# Altium PCB WT2.PcbDoc
Units mm, origin at the board's own origin, x right, y up, seen from the top; angles counter-clockwise.
Board outline 191.64 x 160.53 mm, 2 copper layers (Top Layer, Bottom Layer); 48 components, 68 nets, 157 pads, 0 vias.
Unrouted connection lines stored in the file: 67.
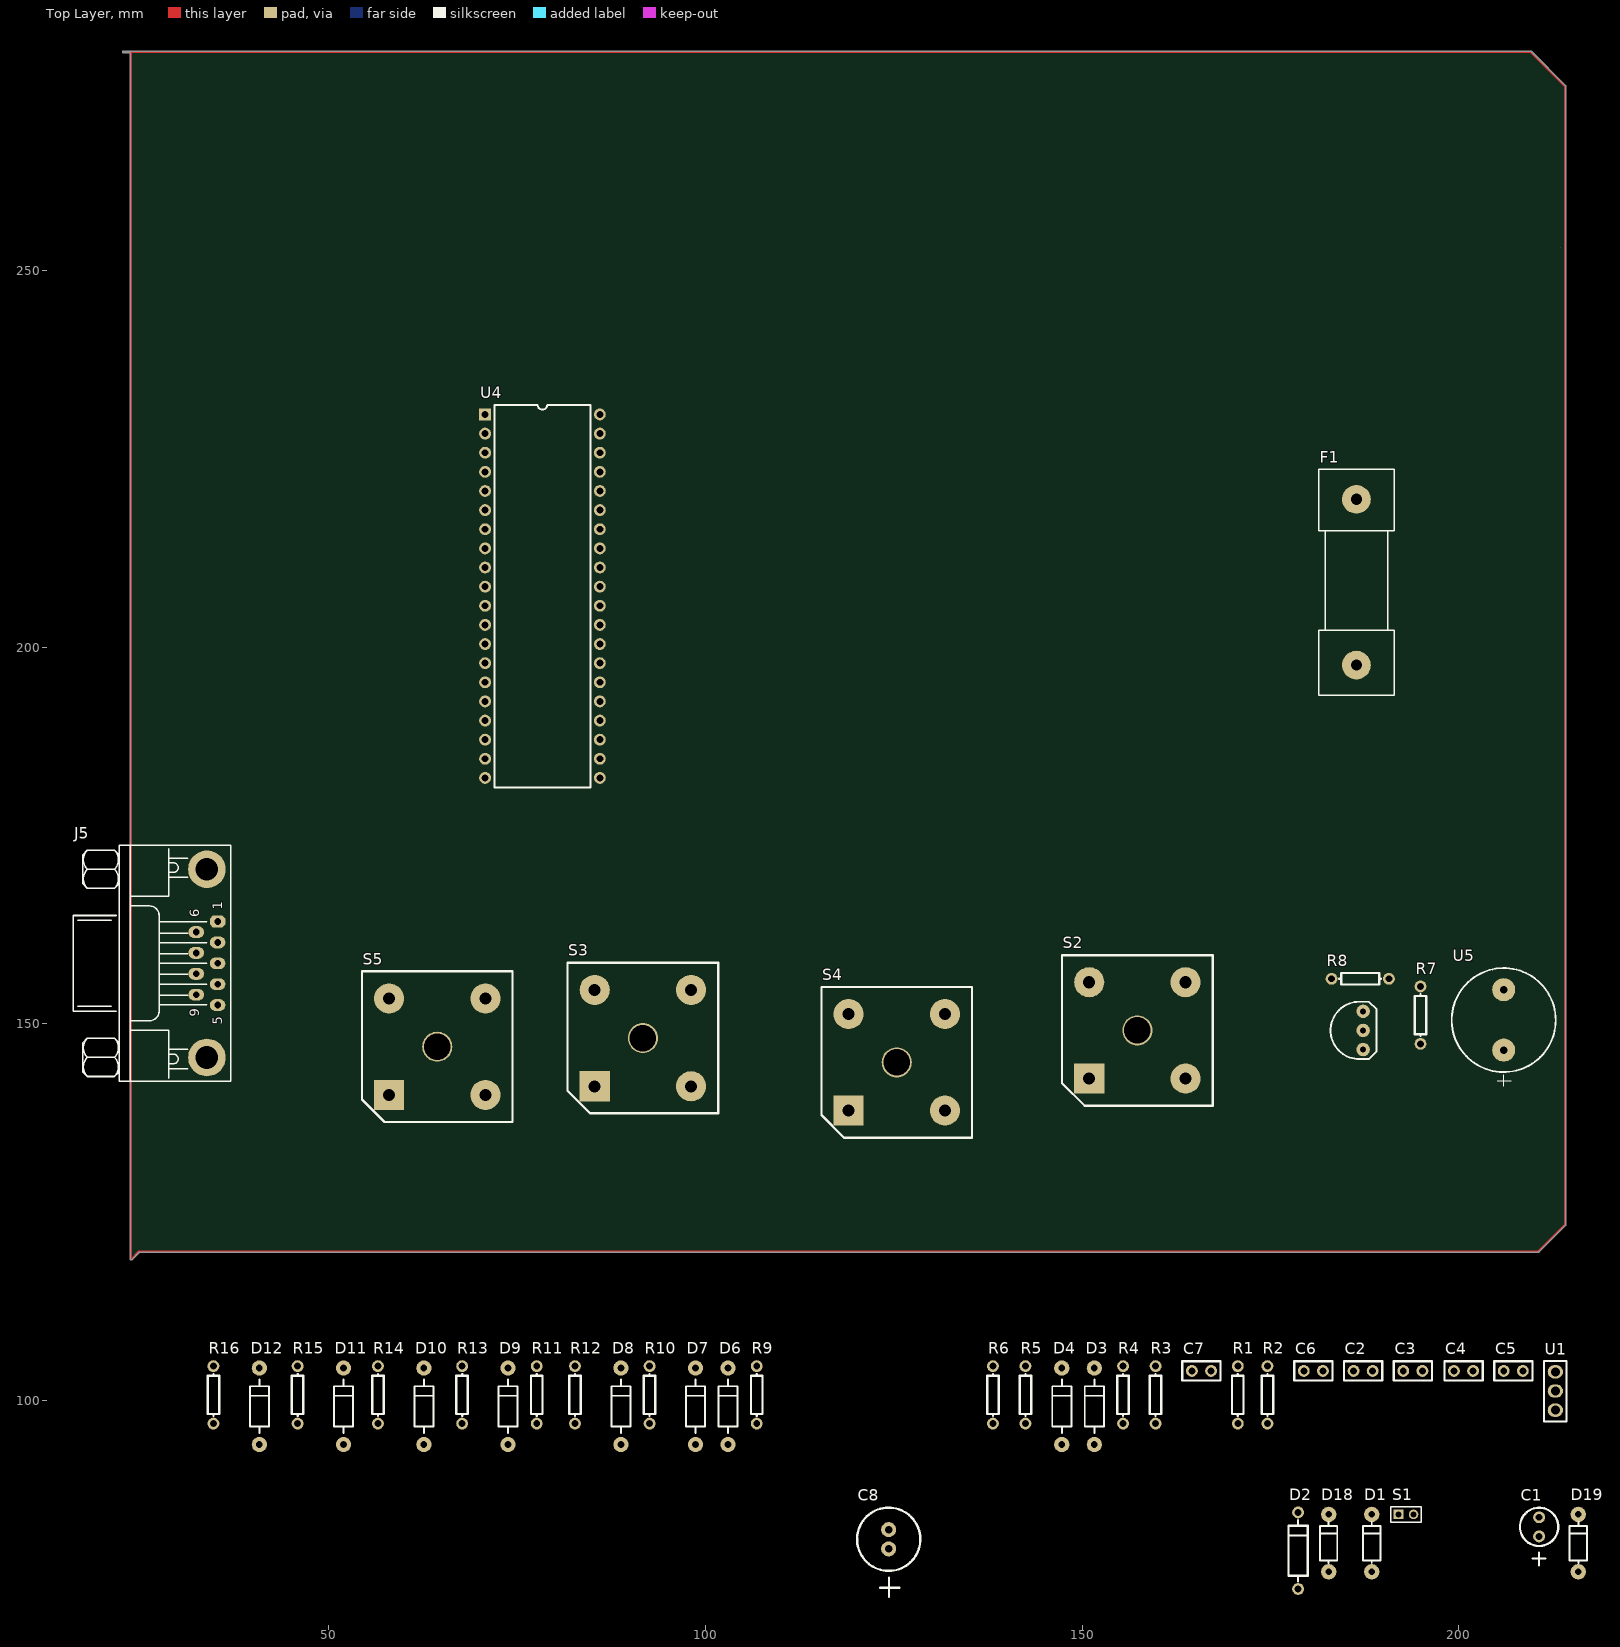
[diagram p0: Top Layer view]
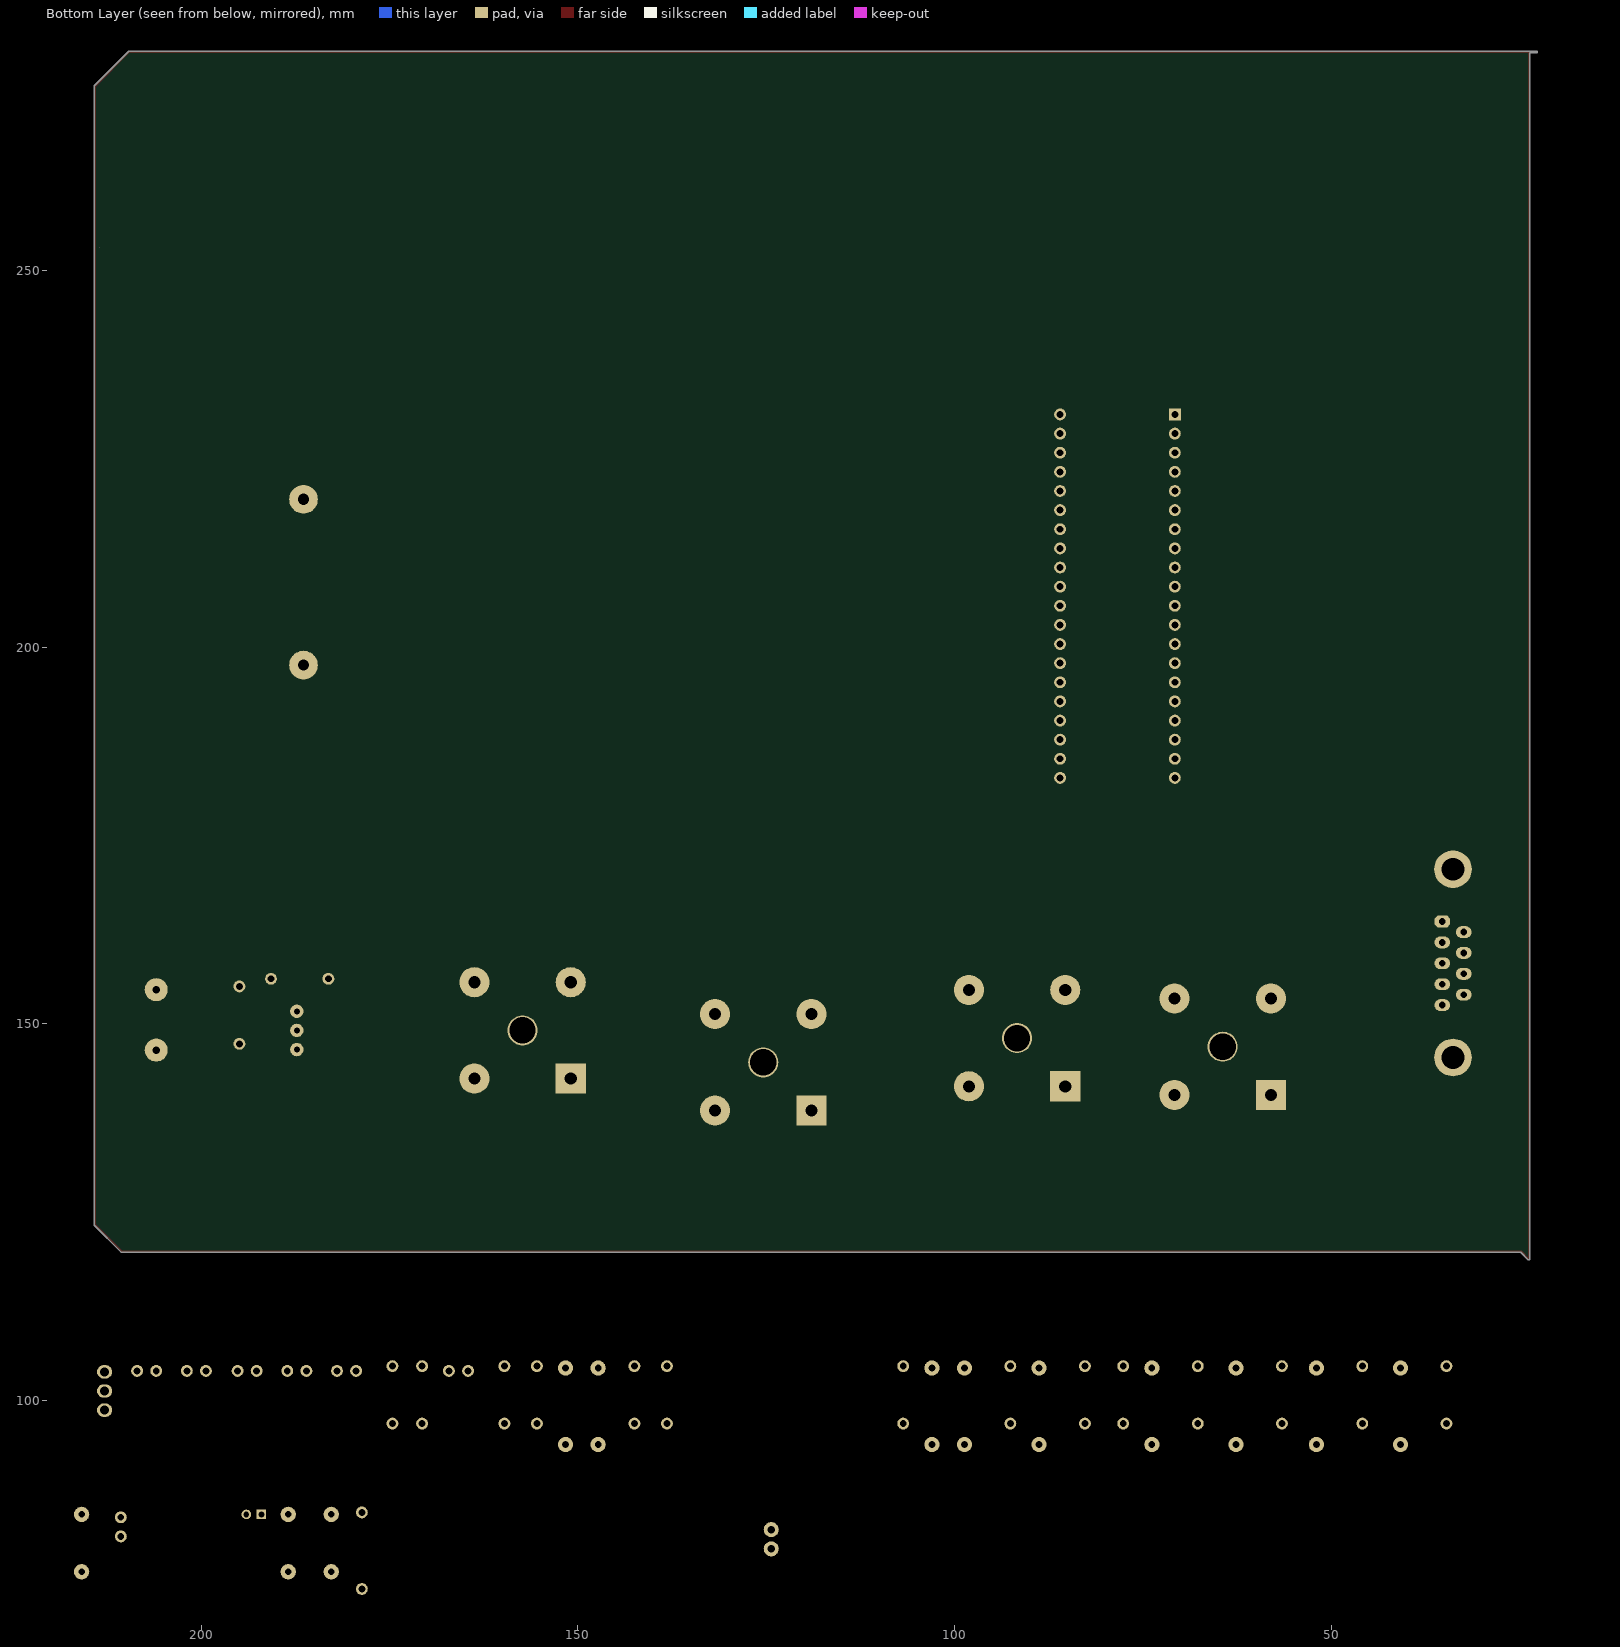
[diagram p1: Bottom Layer view, seen from below]

## Layer stack, top to bottom
Top Solder: solder mask 0.0102, Solder Resist, Dk 3.5
Top Layer: signal copper 0.0356
Dielectric1: dielectric 0.32, FR-4, Dk 4.8
Bottom Layer: signal copper 0.0356
Bottom Solder: solder mask 0.0102, Solder Resist, Dk 3.5

## Board outline
23.622,118.745 23.622,278.892 22.733,278.892 cw(c22.733,279.019) 22.733,279.146 209.55,279.146 cw(c209.55,279.019) 209.641,279.109 209.64,279.109 214.212,274.537 214.212,274.538 cw(c214.122,274.447) 214.249,274.447 214.249,123.317 cw(c214.122,123.317) 214.212,123.226 214.212,123.227 210.656,119.671 210.657,119.671 cw(c210.566,119.761) 210.566,119.634 24.818,119.634 23.839,118.655 23.84,118.655 cw(c23.749,118.745)
cut-out: 213.487,253.111
cut-out: 206.375,348.488

## Design rules (kind name [scope] priority, off if disabled: settings)
AssemblyTestPointUsage [All] p1 off:
AssemblyTestpoint [All] p1 off: testpointundercomponent=TRUE minsize=1.016 maxsize=2.54 preferedsize=1.524 minholesize=0 maxholesize=1.016 preferedholesize=0.813 testpointgrid=0.025 usegrid=TRUE gridtolerance=0 allowsidetop=TRUE allowsidebottom=TRUE
Clearance [All] p1: gap=0.254 ignorepadtopadclearanceinfootprint=FALSE except(0: Arc-Hole Track-Hole SMDPad-Hole THPad-Hole Via-Hole Fill-Hole Poly-Hole Region-Hole Text-Hole)
ComponentClearance [All] p1 off: gap=0.254 collisioncheckmode=3 verticalgap=0.254 showdistances=FALSE
DiffPairsRouting [All] p1 off: maxlimit=0.254 minlimit=0.254 mostfreqgap=0.254 toplayer_minwidth=0.381 toplayer_maxwidth=0.381 toplayer_prefwidth=0.381 bottomlayer_minwidth=0.381 bottomlayer_maxwidth=0.381 bottomlayer_prefwidth=0.381 maxuncoupledlength=12.7
FabricationTestPointUsage [All] p1 off: valid=0 allowmultiple=FALSE
FabricationTestpoint [All] p1 off: side=3 testpointundercomponent=TRUE minsize=1.016 maxsize=2.54 preferedsize=1.524 minholesize=0 maxholesize=1.016 preferedholesize=0.813 testpointgrid=0.025 allowsidetop=TRUE allowsidebottom=TRUE usegrid=TRUE gridtolerance=0
FanoutControl Fanout_BGA [IsBGA] p1 off: bgadir=Out bgaviamode=Centered fanoutstyle=Auto fanoutdirection=Alternating viagrid=0.025 // Fanout_BGA (Default Rule)
FanoutControl Fanout_LCC [IsLCC] p2 off: bgadir=Out bgaviamode=Centered fanoutstyle=Auto fanoutdirection=Alternating viagrid=0.025 // Fanout_LCC (Default Rule)
FanoutControl Fanout_SOIC [IsSOIC] p3 off: bgadir=Out bgaviamode=Centered fanoutstyle=Auto fanoutdirection=Alternating viagrid=0.025 // Fanout_SOIC (Default Rule)
FanoutControl Fanout_Small [(CompPinCount < 5)] p4 off: bgadir=Out bgaviamode=Centered fanoutstyle=Auto fanoutdirection=OutThenIn viagrid=0.025 // Fanout_Small (Default Rule)
FanoutControl Fanout_Default [All] p5 off: bgadir=Out bgaviamode=Centered fanoutstyle=Auto fanoutdirection=Alternating viagrid=0.025 // Fanout_Default (Default Rule)
Height [All] p1 off: minheight=0 maxheight=25.4 prefheight=12.7
HoleSize [All] p1 off: absolutevalues=TRUE maxlimit=2.54 minlimit=0.025 maxpercent=80.000 minpercent=20.000
HoleToHoleClearance [All] p1 off: gap=0.254 allowstackedmicrovias=TRUE
LayerPairs [All] p1 off: enforce=TRUE
MinimumSolderMaskSliver [All] p1 off: minsoldermaskwidth=0.254
NetAntennae [All] p1 off: netantennaetolerance=0
PasteMaskExpansion [All] p1 off: expansion=0
PlaneClearance [All] p1 off: clearance=0.508
PlaneConnect [All] p1 off: planeconnectstyle=Relief reliefexpansion=0.508 reliefentries=4 reliefconductorwidth=0.254 reliefairgap=0.254
PolygonConnect [All] p1 off: connectstyle=Relief reliefconductorwidth=0.254 reliefentries=4 polygonreliefangle="90 Angle" airgapwidth=0.254
RoutingCorners [All] p1 off: cornerstyle=45-Degree minsetback=2.54 maxsetback=2.54
RoutingLayers [All] p1 off: top layer_v5=TRUE bottom layer_v5=TRUE
RoutingPriority [All] p1 off: routingpriority=0
RoutingTopology [All] p1 off: topology=Shortest
RoutingVias [All] p1 off: holewidth=0.711 width=1.27 viastyle="Through Hole" minholewidth=0.711 minwidth=1.27 maxholewidth=0.711 maxwidth=1.27
SilkToSilkClearance [All] p1 off: silktosilkclearance=0.254
SilkToSolderMaskClearance SilkscreenOverComponentPads [IsPad] p1 off: minsilkscreentomaskgap=0.254 clearancetoexposedcopper=TRUE
SolderMaskExpansion [All] p1 off: expansion=0.102
Width [All] p1 off: maxlimit=0.254 minlimit=0.254 preferedwidth=0.254
4 further rules are at their usual default settings.

## Classes and differential pairs
component class WT2: C1 C2 C3 C4 C5 C6 C7 C8 D1 D2 D3 D4 D6 D7 D8 D9 D10 D11 D12 D18 D19 F1 J5 R1 R2 R3 R4 R5 R6 R7 R8 R9 R10 R11 R12 R13 R14 R15 R16 S1 S2 S3 S4 S5

## Components (designator, comment, footprint, x,y, rotation, side; value= is the part's Value field where it differs from the comment)
C1 "100uf" 10UF 210.693,81.915 r90 top
C2 "0.01u" RAD0.1 186.055,103.886 r0 top
C3 "0.01u" RAD0.1 192.659,103.886 r0 top
C4 "0.01u" RAD0.1 199.39,103.886 r0 top
C5 "0.01u" RAD0.1 205.994,103.886 r0 top
C6 "0.1u" RAD0.1 179.451,103.886 r0 top
C7 "1u" RAD0.1 164.592,103.886 r0 top
C8 "10uf" 100UF 124.333,80.264 r90 top
D1 "5V" Diode0.3 188.468,81.026 r90 top
D2 "5V" DIODE 178.689,74.93 r90 top
D3 "N1显示" DIODE0.4A 152.146,99.187 r90 top
D4 "N20显示" DIODE0.4A 147.828,99.187 r90 top
D6 "工作电压指示" DIODE0.4A 103.505,99.187 r90 top
D7 "20毫秒指示" DIODE0.4A 99.187,99.187 r90 top
D8 "40毫秒指示" DIODE0.4A 89.281,99.187 r90 top
D9 "80毫秒指示" DIODE0.4A 74.295,99.187 r90 top
D10 "单次/循环" DIODE0.4A 63.119,99.187 r90 top
D11 "启动检测" DIODE0.4A 52.451,99.187 r90 top
D12 "故障指示" DIODE0.4A 41.275,99.187 r90 top
D18 "DIODE" Diode0.3 182.753,81.026 r90 top
D19 "DIODE" Diode0.3 215.9,81.026 r90 top
F1 "100A" FUSE 186.436,197.612 r90 top
J5 "DB9" DB9 33.803,157.999 r90 top
R1 "47K" AXIAL0.3 170.688,96.901 r90 top
R2 "330" AXIAL0.3 174.625,96.901 r90 top
R3 "330" AXIAL0.3 159.766,96.901 r90 top
R4 "62K" AXIAL0.3 155.448,96.901 r90 top
R5 "330" AXIAL0.3 142.494,96.901 r90 top
R6 "330" AXIAL0.3 138.176,96.901 r90 top
R7 "10K" AXIAL0.3 194.945,147.32 r90 top
R8 "1K" AXIAL0.3 183.134,155.956 r0 top
R9 "4.7k" AXIAL0.3 106.807,96.901 r90 top
R10 "1k" AXIAL0.3 92.583,96.901 r90 top
R11 "1k" AXIAL0.3 77.597,96.901 r90 top
R12 "10K" AXIAL0.3 82.677,96.901 r90 top
R13 "1k" AXIAL0.3 67.691,96.901 r90 top
R14 "1k" AXIAL0.3 56.515,96.901 r90 top
R15 "1k" AXIAL0.3 45.847,96.901 r90 top
R16 "1k" AXIAL0.3 34.671,96.901 r90 top
S1 "测试电源开关、" SIP2-2.0 192.024,84.836 r0 top
S2 "复位开关" KBPC106 157.353,149.098 r0 top
S3 "启动测试" KBPC106 91.694,148.082 r0 top
S4 "设置单次/循环" KBPC106 125.399,144.857 r0 top
S5 "设置延时时间20-80" KBPC106 64.389,146.939 r0 top
U1 "78L05" 78XX 212.852,98.679 r90 top
U4 "STC15W1K16S_PDIP40" DIP40 70.739,230.886 r0 top
U5 "蜂鸣器" BELL 205.994,150.495 r270 top
? "S8085" TO-92 189.713,146.609 r90 top

## Footprints (in the part's own frame and the unit in brackets; to place one, negate y for a bottom-side part, rotate by r counter-clockwise, add the part's x,y. Pads: shape width x height; smd on the part's side, far side on the other; paste and mask are expansions set on the pad)
10UF [mil]
  round 62 hole 35.43: 1(0,0) 2(100,0)
  silkscreen extent -152,-100 150,100
78XX [mil]
  oval 70x80 hole 47.24: 1(0,0) 2(100,0) 3(200,0)
  silkscreen extent -59,-59 256,59
100UF [mm]
  round 2 hole 1: 1(0,0) 2(2.54,0)
  silkscreen extent -6.39,-4.2 5.47,4.2
AXIAL0.3 [mil]
  round 62 hole 36: 1(0,0) 2(300,0)
  silkscreen extent 41,-30 259,30
BELL [mil]
  round 120 hole 40: 1(158,0) 2(-158,0)
  silkscreen extent -271,-272 348,272
DB9 [mil]
  oct 62x82 hole 35: 1(218.75,-55.83)
  oval 62x82 hole 35: 2(109.58,-55.83) 3(0.42,-55.83) 4(-108.75,-55.83) 5(-217.92,-55.83) 6(163.75,55.83) 7(54.58,55.83) 8(-54.58,55.83)
  oval 60x82 hole 35: 9(-163.75,55.83)
  round 196.67 hole 118.33: BO1(-492.08,0) BO2(492.08,0)
  silkscreen extent -616,-125 617,700
DIODE [mil]
  round 62 hole 35.43: A(0,0) K(400,0)
  silkscreen extent 40,-50 360,50
Diode0.3 [mil]
  round 80 hole 35: 1(-150,0) 2(150,0)
  silkscreen extent -105,-45 110,45
DIODE0.4A [mil]
  round 80 hole 35: A(-200,20) K(200,20)
  silkscreen extent -140,-30 140,70
DIP40 [mil]
  rect 62x62 hole 36: 1(0,0)
  round 62 hole 36: 2(0,-100) 3(0,-200) 4(0,-300) 5(0,-400) 6(0,-500) 7(0,-600) 8(0,-700) 9(0,-800) 10(0,-900) 11(0,-1000) 12(0,-1100) 13(0,-1200) 14(0,-1300) 15(0,-1400) 16(0,-1500) 17(0,-1600) 18(0,-1700) 19(0,-1800) 20(0,-1900) 21(600,-1900) 22(600,-1800) 23(600,-1700) 24(600,-1600) 25(600,-1500) 26(600,-1400) 27(600,-1300) 28(600,-1200) 29(600,-1100) 30(600,-1000) 31(600,-900) 32(600,-800) 33(600,-700) 34(600,-600) 35(600,-500) 36(600,-400) 37(600,-300) 38(600,-200) 39(600,-100) 40(600,0)
  silkscreen extent 50,-1950 550,50
FUSE [mm]
  round 3.81 hole 1.5: 1(0,0) 2(22,0)
  silkscreen extent -4,-5 26,5
KBPC106 [mm]
  round 4 hole 3.5: 0(0,0)
  rect 4x4 hole 1.6: 1(-6.4,-6.4)
  round 4 hole 1.6: 2(6.4,-6.4) 3(6.4,6.4) 4(-6.4,6.4)
  silkscreen extent -10,-10 10,10
RAD0.1 [mil]
  round 62 hole 36: 1(0,0) 2(100,0)
  silkscreen extent -50,-50 150,50
SIP2-2.0 [mil]
  rect 50x50 hole 30: 1(0,0)
  round 50 hole 30: 2(78.74,0)
  silkscreen extent -40,-40 120,40
TO-92 [mil]
  round 70 hole 31.5: B(98,94) C(198,94) E(-2,94)
  silkscreen extent -52,24 248,264

## Part data
C1 C8: library part 电解电容, "Capacitor"
C2 C3 C4 C5 C6 C7: library part 普通电容, "Capacitor"
D1 D2: library part ZENER3, "Zener Diode"
D3 D4 D6 D7 D8 D9 D10 D11 D12: library part 发光二极管
D18 D19: "Diode"
F1: library part FUSE1, "Fuse"
R1 R2 R3 R4 R5 R6 R7 R8 R9 R10 R11 R12 R13 R14 R15 R16: library part RES
S1: library part "SW DPST"
S2 S3 S4 S5: library part 微动开关
U1: "3-Terminal Positive Voltage Regulator"
U5: library part BUZZER, "Buzzer"
?: library part NPNN

## Nets (pads, with @x,y where several pads share a name; then routed paths per layer and width w, separated by ;. In a path a pad name is that pad's centre, name@x,y a point inside that pad or via, vN(x,y) a via of type N, cw(c..) or ccw(c..) an arc to the next point about the centre after c; other vN are vias at no path point)
12V: C1.1 C6.1 D19.2 R9.1 U1.1
20MS: R10.1 U4.3
40MS: R11.1 U4.4
80MS: R13.1 U4.5
AD5: D18.2 U4.1
Beep: R8.1 U4.2
Con16: U4.39
Cont1: R5.1 U4.9
Cont2: U4.10
Cont3: U4.11
Cont4: U4.12
Cont5: U4.13
Cont6: U4.14
Cont7: U4.15
Cont8: U4.16
Cont9: U4.32
Cont10: U4.33
Cont11: U4.34
Cont12: U4.35
Cont13: U4.36
Cont14: U4.37
Cont15: U4.38
Cont17: U4.25
Cont18: U4.26
Cont19: U4.27
Cont20: R6.1 U4.28
Cyc: S4.2 U4.31
Deltime: S5.2 U4.8
Fault: R16.1 U4.19
GND: C1.2 C2.2 C3.2 C4.2 C5.2 C6.2 D6.K J5.5 R4.1 R7.1 R12.1 S3.1 S4.1 S5.1 U1.2 U4.20
Net_1: R7.2 R8.2
Net_2: U5.2
NetC7_1: C7.1 R1.1 R4.2
NetC7_2: C7.2 D1.1 D18.1
NetC8_2: C8.2 R12.2 S2.2 U4.17
NetD3_K: D3.K
NetD4_K: D4.K
NetD6_A: D6.A R9.2
NetD7_K: D7.K R10.2
NetD8_K: D8.K R11.2
NetD9_K: D9.K R13.2
NetD10_K: D10.K R14.2
NetD11_K: D11.K R15.2
NetD12_K: D12.K R16.2
NetD19_1: D19.1
NetF1_1: F1.1 S1.2
NetF1_2: F1.2
NetF2_1: 
NetF2_2: 
NetJ1_1: 
NetJ1_2: 
NetJ1_39: 
NetJ4_1: 
NetJ4_2: 
Netq1_2: R2.2
Netq1_3: S1.1
Netq2_2: R3.2
NetR1_2: R1.2
NetR2_1: R2.1
NetR3_1: R3.1
NetR5_2: R5.2
NetR6_2: R6.2
RXD: J5.2 U4.21
Start: R15.1 U4.7
Startkey: S3.2 U4.30
TimeS: R14.1 U4.6
TXD: J5.3 U4.22
VCC: C2.1 C3.1 C4.1 C5.1 C8.1 D1.2 D3.A D4.A D7.A D8.A D9.A D10.A D11.A D12.A S2.1 U1.3 U4.18 U5.1
pads on no net: ?.B ?.C ?.E D2.A D2.K J5.1 J5.4 J5.6 J5.7 J5.8 J5.9 J5.BO1 J5.BO2 S2.0 S2.3 S2.4 S3.0 S3.3 S3.4 S4.0 S4.3 S4.4 S5.0 S5.3 S5.4 U4.23 U4.24 U4.29 U4.40
copper on no net: | length 697
  Top Layer w0.254: 22.733,279.019 209.55,279.019 214.122,274.447 214.122,123.317 210.566,119.761 24.765,119.761 23.749,118.745 23.749,279.019

## Polygon pours and split planes (outlines as drawn)
no net on Top Layer "Top Layer-No Net 1" (solid, pour order 2): 104.14,113.538

## Text inside footprints (layer, text, board x,y; h text height)
J5: Top Overlay "5" at 35.835,149.881 h1.27 r90; Top Overlay "9" at 32.787,150.897 h1.27 r90; Top Overlay "6" at 32.787,164.105 h1.27 r90; Top Overlay "1" at 35.835,165.121 h1.27 r90